# Altium PCB SiLPA.PcbDoc (part 1 of 10)
Units mm, origin at the board's own origin, x right, y up, seen from the top; angles counter-clockwise.
Board outline 222.36 x 100 mm, 4 copper layers (L1, P2, L3, L4), stack 1.598 mm thick; 583 components, 330 nets, 1692 pads, 1781 vias.
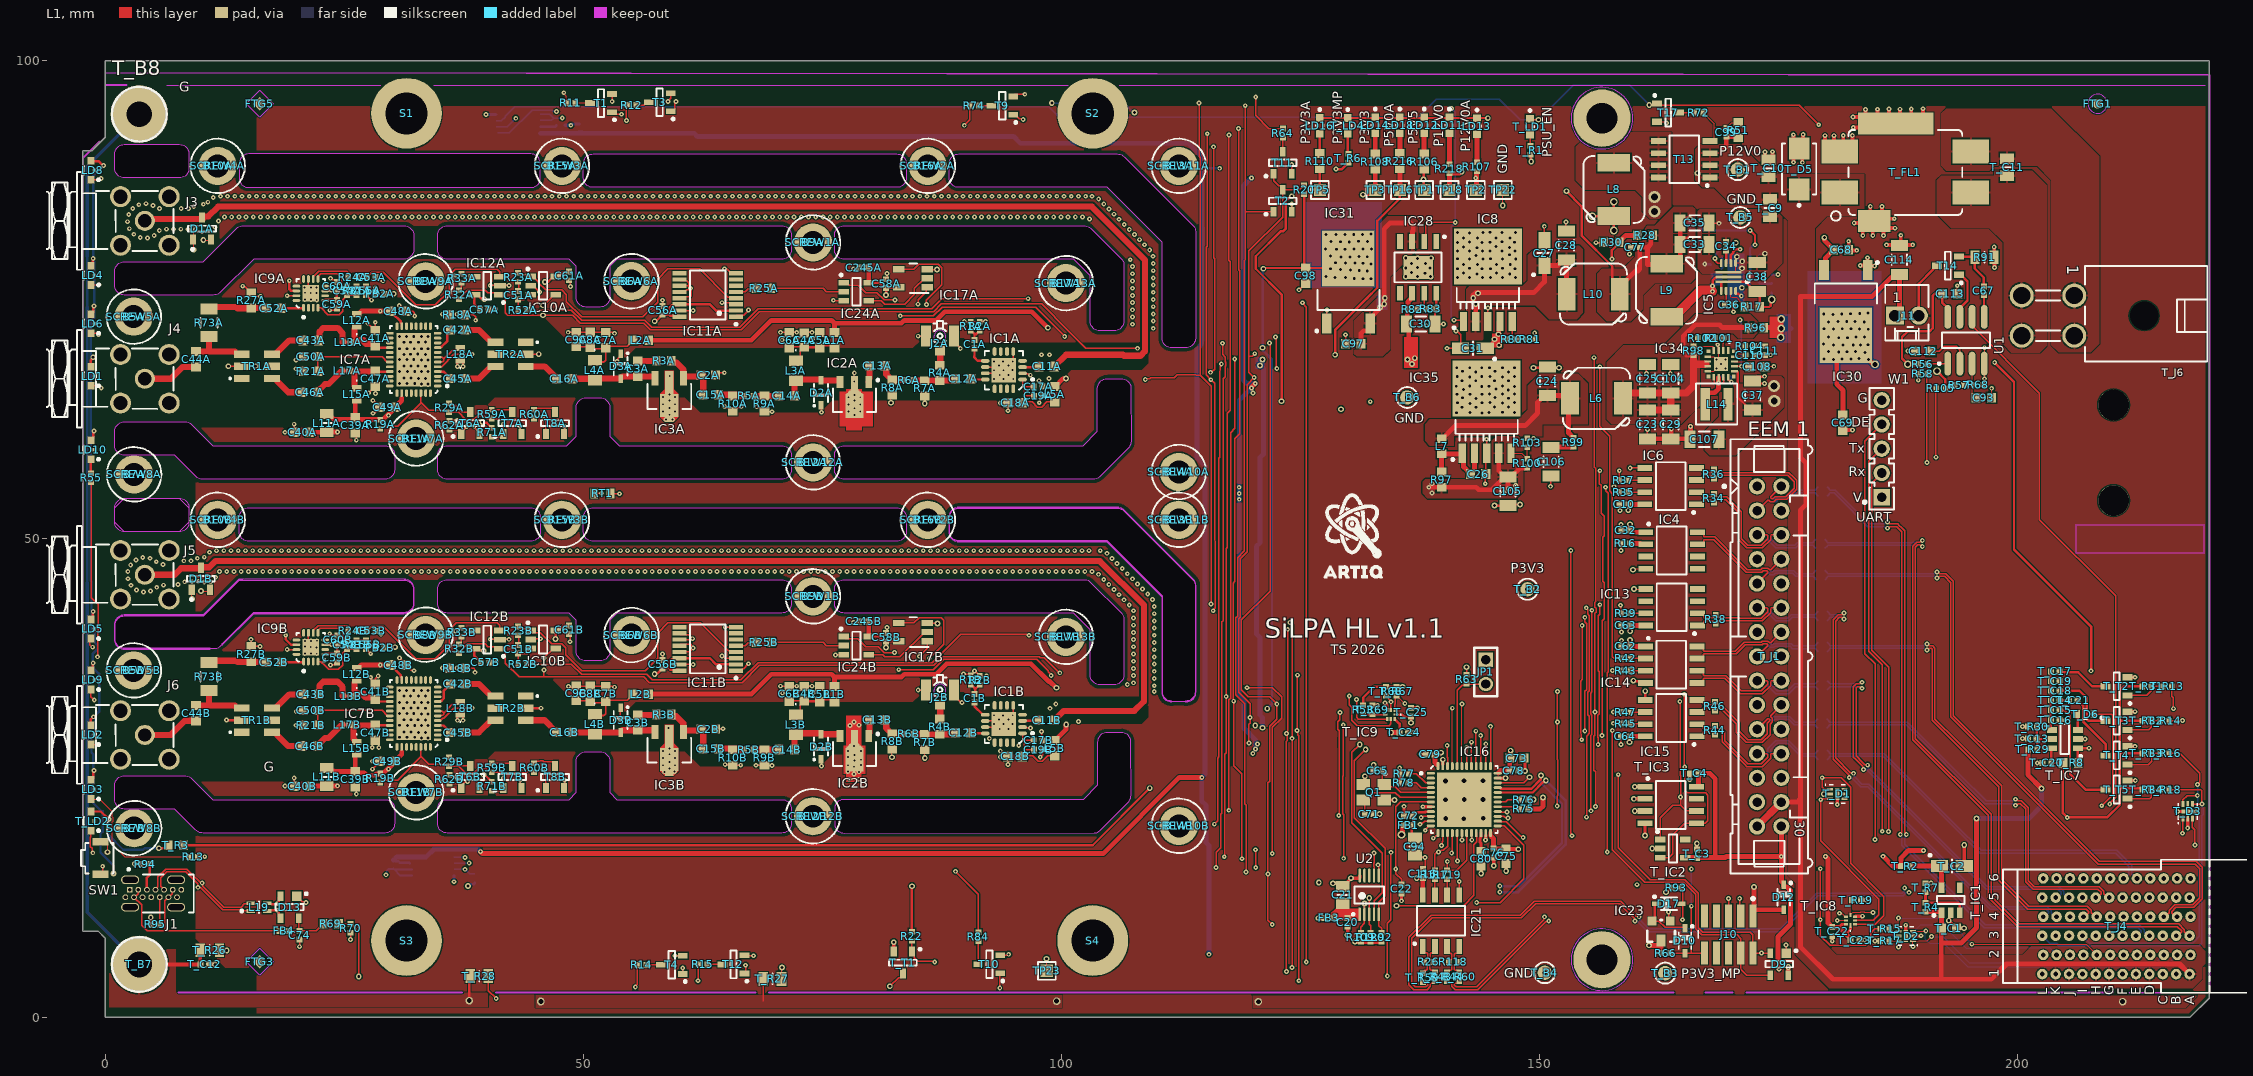
[diagram p0: L1 view]
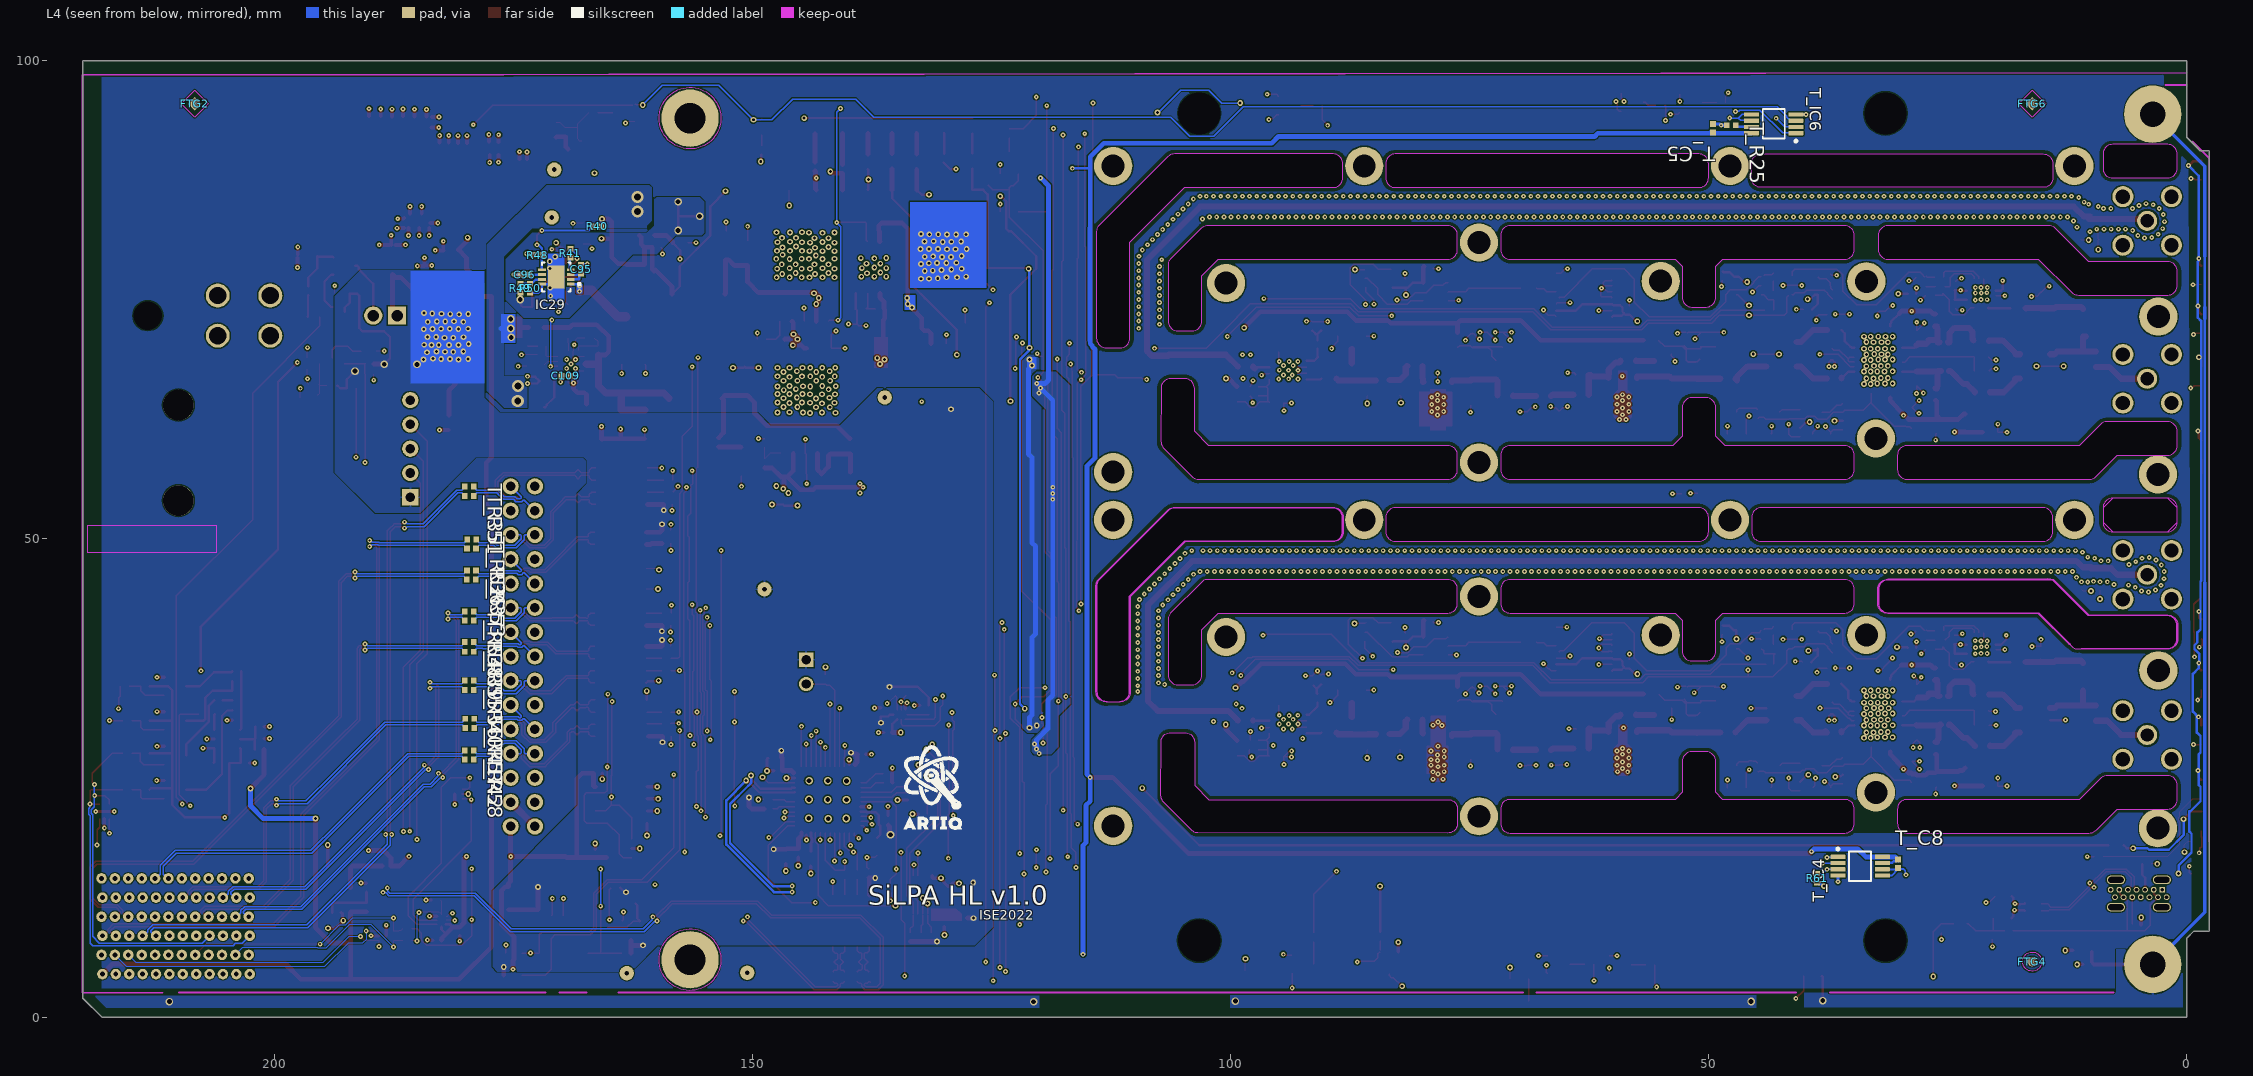
[diagram p1: L4 view, seen from below]
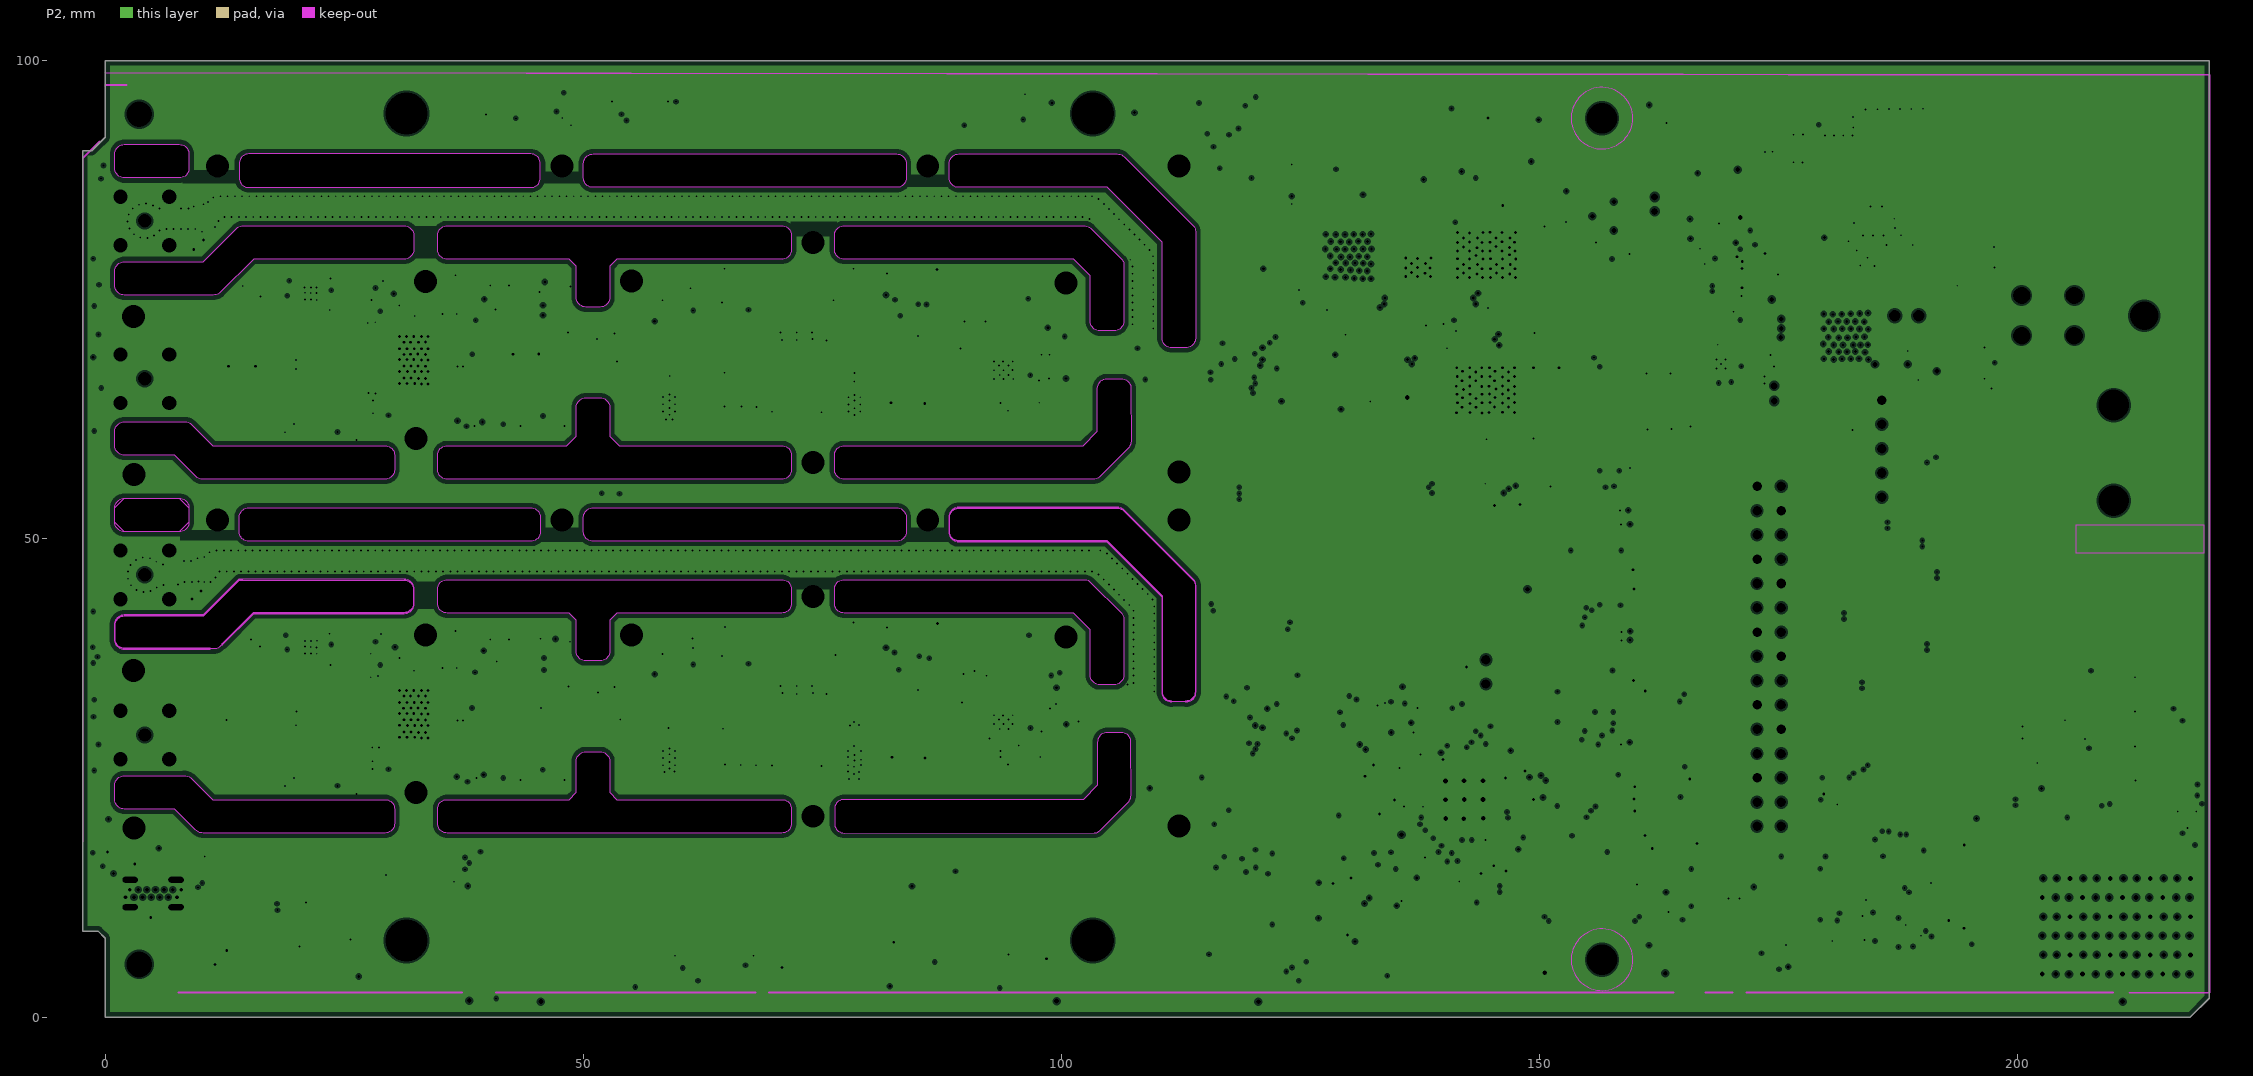
[diagram p2: P2, clearances drawn from the general rule]
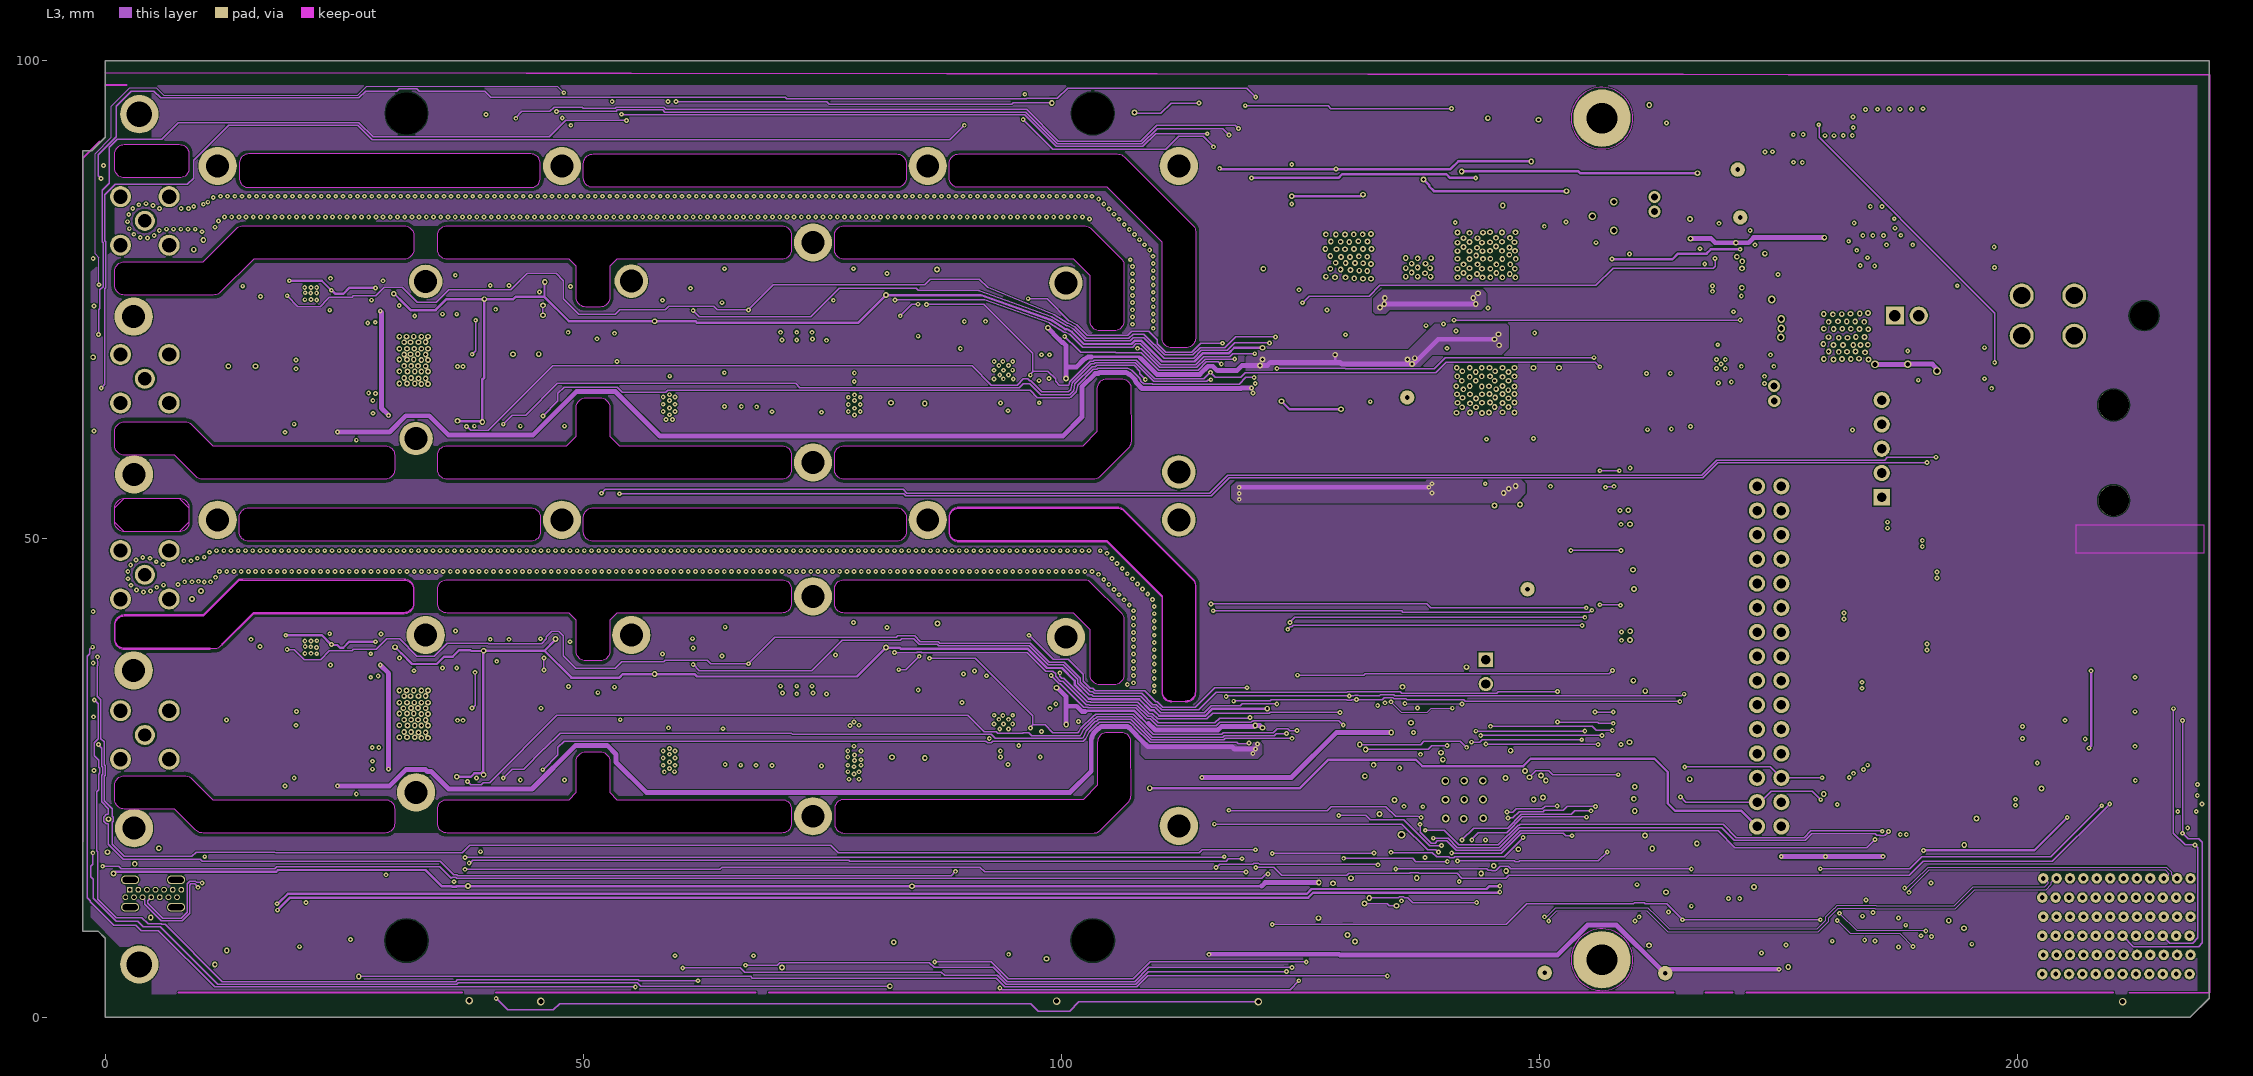
[diagram p3: L3]

## Layer stack, top to bottom
TopSolder: solder mask 0.0225, Solder Resist, Dk 3.5
L1: signal copper 0.053
Dielectric1: core 0.36, FR-4, Dk 4.2
P2: plane copper 0.036, net GND
Dielectric3: core 0.7, FR-4, Dk 4.2
L3: signal copper 0.036
Dielectric5: core 0.36, FR-4, Dk 4.2
L4: signal copper 0.053
BottomSolder: solder mask 0.0225, Solder Resist, Dk 3.5

## Board outline
0,0 0,8.25 -0.75,9 -2.356,9 -2.356,89.938 -2.356,90.575 -1.425,90.575 -1,91 0,92 0,100 220,100 220,1.98 218.02,0
cut-out: 15,49.75 cw(c15,50.75) 14,50.75 14,52.25 cw(c15,52.25) 15,53.25 44.5,53.25 cw(c44.5,52.25) 45.5,52.25 45.5,50.75 cw(c44.5,50.75) 44.5,49.75
cut-out: 89.25,86.75 cw(c89.25,87.75) 88.25,87.75 88.25,89.25 cw(c89.25,89.25) 89.25,90.25 105.842,90.257 cw(c105.842,89.289) 106.526,89.974 113.774,82.726 cw(c113.213,82.166) 114.006,82.166 114,71 cw(c113,71) 113,70 111.5,70 cw(c111.5,71) 110.5,71 110.5,81 104.75,86.75
cut-out: 89.25,49.75 cw(c89.25,50.75) 88.25,50.75 88.25,52.25 cw(c89.25,52.25) 89.25,53.25 105.807,53.258 cw(c105.807,52.206) 106.536,52.963 113.737,45.762 cw(c113.043,45.093) 114.007,45.093 114,34 cw(c113,34) 113,33 111.5,33 cw(c111.5,34) 110.5,34 110.5,44 104.75,49.75
cut-out: 89.25,49.7 104.729,49.7 110.45,43.979 110.45,34 ccw(c111.5,34) 111.5,32.95 111.5,33.05 cw(c111.5,34) 110.55,34 110.55,44 110.536,44.036 104.786,49.786 104.75,49.8 89.25,49.8 cw(c89.25,50.75) 88.3,50.75 88.3,52.25 cw(c89.25,52.25) 89.25,53.2 105.807,53.207 cw(c105.807,52.206) 106.501,52.927 113.701,45.727 cw(c113.043,45.093) 113.956,45.093 113.95,34 cw(c113,34) 113,33.05 ccw(c113,33) 113,32.95 ccw(c113,34) 114.05,34 114.057,45.093 ccw(c113.043,45.093) 113.773,45.797 113.772,45.798 106.572,52.999 106.571,53 ccw(c105.807,52.206) 105.807,53.308 89.25,53.3 ccw(c89.25,52.25) 88.2,52.25 88.2,50.75 ccw(c89.25,50.75)
cut-out: 76.25,20.25 ccw(c77.25,20.25) 77.25,19.25 103.417,19.26 ccw(c103.417,20.083) 103.989,19.49 106.963,22.464 ccw(c106.206,23.194) 107.258,23.194 107.25,28.75 ccw(c106.25,28.75) 106.25,29.75 104.75,29.75 ccw(c104.75,28.75) 103.75,28.75 103.75,24.25 102.25,22.75 77.25,22.75 ccw(c77.25,21.75) 76.25,21.75
cut-out: 2,21.75 cw(c2,22.75) 1,22.75 1,24.25 cw(c2,24.25) 2,25.25 8.21,25.254 cw(c8.21,23.959) 9.108,24.891 11.25,22.75 29.25,22.75 cw(c29.25,21.75) 30.25,21.75 30.25,20.25 cw(c29.25,20.25) 29.25,19.25 10.258,19.245 cw(c10.258,20.459) 9.416,19.585 7.25,21.75
cut-out: 35.75,19.25 cw(c35.75,20.25) 34.75,20.25 34.75,21.75 cw(c35.75,21.75) 35.75,22.75 48.5,22.75 49.25,23.5 49.25,26.75 cw(c50.25,26.75) 50.25,27.75 51.75,27.75 cw(c51.75,26.75) 52.75,26.75 52.75,23.5 53.5,22.75 70.75,22.75 cw(c70.75,21.75) 71.75,21.75 71.75,20.25 cw(c70.75,20.25) 70.75,19.25
cut-out: 77.25,42.25 cw(c77.25,43.25) 76.25,43.25 76.25,44.75 cw(c77.25,44.75) 77.25,45.75 102.343,45.757 cw(c102.343,44.793) 103.012,45.487 106.292,42.205 cw(c105.798,41.729) 106.484,41.729 106.5,35.75 cw(c105.5,35.75) 105.5,34.75 104,34.75 cw(c104,35.75) 103,35.75 103,40.5 101.25,42.25
cut-out: 49.25,41.5 48.5,42.25 35.75,42.25 cw(c35.75,43.25) 34.75,43.25 34.75,44.75 cw(c35.75,44.75) 35.75,45.75 70.75,45.75 cw(c70.75,44.75) 71.75,44.75 71.75,43.25 cw(c70.75,43.25) 70.75,42.25 53.5,42.25 52.75,41.5 52.75,38.25 cw(c51.75,38.25) 51.75,37.25 50.25,37.25 cw(c50.25,38.25) 49.25,38.25
cut-out: 2,38.5 cw(c2,39.5) 1,39.5 1,41 cw(c2,41) 2,42 10.175,42 13.601,45.426 cw(c14.554,44.437) 14.554,45.81 31.25,45.8 31.25,45.75 cw(c31.25,44.75) 32.25,44.75 32.25,43.25 cw(c31.25,43.25) 31.25,42.25 15.5,42.25 12.012,38.763 cw(c11.343,39.457) 11.343,38.493
cut-out: 35.75,56.25 cw(c35.75,57.25) 34.75,57.25 34.75,58.75 cw(c35.75,58.75) 35.75,59.75 48.25,59.75 49.25,60.75 49.25,63.75 cw(c50.25,63.75) 50.25,64.75 51.75,64.75 cw(c51.75,63.75) 52.75,63.75 52.75,60.75 53.75,59.75 70.75,59.75 cw(c70.75,58.75) 71.75,58.75 71.75,57.25 cw(c70.75,57.25) 70.75,56.25
cut-out: 77.25,56.25 cw(c77.25,57.25) 76.25,57.25 76.25,58.75 cw(c77.25,58.75) 77.25,59.75 102.25,59.75 103.75,61.25 103.75,65.75 cw(c104.75,65.75) 104.75,66.75 106.25,66.75 cw(c106.25,65.75) 107.25,65.75 107.258,60.194 cw(c106.206,60.194) 106.963,59.464 104.048,56.549 cw(c103.288,57.337) 103.288,56.242
cut-out: 51,49.75 cw(c51,50.75) 50,50.75 50,52.25 cw(c51,52.25) 51,53.25 82.75,53.25 cw(c82.75,52.25) 83.75,52.25 83.75,50.75 cw(c82.75,50.75) 82.75,49.75
cut-out: 2,50.75 cw(c2,51.75) 1,51.75 1,53.25 cw(c2,53.25) 2,54.25 7.75,54.25 cw(c7.75,53.25) 8.75,53.25 8.75,51.75 cw(c7.75,51.75) 7.75,50.75
cut-out: 2,58.75 cw(c2,59.75) 1,59.75 1,61.25 cw(c2,61.25) 2,62.25 8.399,62.241 cw(c8.399,61.374) 9.001,61.998 11.25,59.75 29.25,59.75 cw(c29.25,58.75) 30.25,58.75 30.25,57.25 cw(c29.25,57.25) 29.25,56.25 10.129,56.24 cw(c10.129,57.129) 9.512,56.489 7.25,58.75
cut-out: 2,75.5 cw(c2,76.5) 1,76.5 1,78 cw(c2,78) 2,79 10.25,79 13.725,82.476 cw(c14.427,81.748) 14.427,82.759 31.25,82.75 cw(c31.25,81.75) 32.25,81.75 32.25,80.25 cw(c31.25,80.25) 31.25,79.25 15.5,79.25 12.035,75.797 cw(c11.3,76.559) 11.3,75.5
cut-out: 49.25,78.5 48.5,79.25 35.75,79.25 cw(c35.75,80.25) 34.75,80.25 34.75,81.75 cw(c35.75,81.75) 35.75,82.75 70.75,82.75 cw(c70.75,81.75) 71.75,81.75 71.75,80.25 cw(c70.75,80.25) 70.75,79.25 53.5,79.25 52.75,78.5 52.75,75.25 cw(c51.75,75.25) 51.75,74.25 50.25,74.25 cw(c50.25,75.25) 49.25,75.25
cut-out: 77.25,79.25 cw(c77.25,80.25) 76.25,80.25 76.25,81.75 cw(c77.25,81.75) 77.25,82.75 102.34,82.758 cw(c102.34,81.786) 103.027,82.474 106.328,79.166 cw(c105.912,78.75) 106.5,78.75 106.5,72.75 cw(c105.5,72.75) 105.5,71.75 104,71.75 cw(c104,72.75) 103,72.75 103,77.5 101.25,79.25
cut-out: 50,87.75 50,89.25 cw(c51,89.25) 51,90.25 82.75,90.25 cw(c82.75,89.25) 83.75,89.25 83.75,87.75 cw(c82.75,87.75) 82.75,86.75 51,86.75 cw(c51,87.75)
cut-out: 15,86.75 44.5,86.75 ccw(c44.5,87.75) 45.5,87.75 45.5,89.25 ccw(c44.5,89.25) 44.5,90.25 15,90.25 ccw(c15,89.25) 14,89.25 14,87.75 ccw(c15,87.75)
cut-out: 2,87.75 cw(c2,88.75) 1,88.75 1,90.25 cw(c2,90.25) 2,91.25 7.75,91.25 cw(c7.75,90.25) 8.75,90.25 8.75,88.75 cw(c7.75,88.75) 7.75,87.75
cut-out: 2,38.55 cw(c2,39.5) 1.05,39.5 1.05,41 cw(c2,41) 2,41.95 10.25,41.95 10.286,41.964 14.021,45.7 31.25,45.7 cw(c31.25,44.75) 32.2,44.75 32.2,43.25 cw(c31.25,43.25) 31.25,42.3 15.5,42.3 15.464,42.286 12.214,39.036 ccw(c12.25,39) 12.286,38.964 15.521,42.2 31.25,42.2 ccw(c31.25,43.25) 32.3,43.25 32.3,44.75 ccw(c31.25,44.75) 31.25,45.8 14,45.8 13.964,45.786 10.229,42.05 2,42.05 ccw(c2,41) 0.95,41 0.95,39.5 ccw(c2,39.5) 2,38.45 11,38.45 11,38.55
cut-out: 2,54.25 7.75,54.25 8.75,53.25 8.75,51.75 7.75,50.75 2,50.75 1,51.75 1,53.25

## Design rules (kind name [scope] priority, off if disabled: settings)
AcuteAngle [All] p1: minimum=6.00000000000000E+0001 checktracksonly=FALSE
AssemblyTestPointUsage [All] p1 off:
AssemblyTestpoint [All] p1 off: testpointundercomponent=TRUE minsize=1.016 maxsize=2.54 preferedsize=1.524 minholesize=0 maxholesize=1.016 preferedholesize=0.813 testpointgrid=0.025 usegrid=TRUE gridtolerance=0 allowsidetop=TRUE allowsidebottom=TRUE
BoardOutlineClearance [OnLayer('L1')      or OnLayer('L4')    or OnLayer('L3')] p1: gap=0.4 ignorepadtopadclearanceinfootprint=FALSE
Clearance Clearance_Heatsink [(OnLayer('Mechanical 13'))] p1: gap=0 ignorepadtopadclearanceinfootprint=FALSE
Clearance Clearance_50Ohm [InNetClass('50Ohm') or InNetClass('50_Ohms')] p2: gap=0.203 ignorepadtopadclearanceinfootprint=TRUE
Clearance [All] p3: gap=0.125 ignorepadtopadclearanceinfootprint=FALSE except(0.12: SMDPad-SMDPad)
Clearance Clearance_50Ohm_Poly [InNetClass('50_Ohms') vs InPolygon] p4: gap=0.5 ignorepadtopadclearanceinfootprint=FALSE except(0: Arc-Hole Track-Hole SMDPad-Hole THPad-Hole Via-Hole Fill-Hole Poly-Hole Region-Hole Text-Hole)
Clearance Clearance_outer [OnLayer('TopLayer') or OnLayer('BottomLayer')] p5: gap=0.089 ignorepadtopadclearanceinfootprint=FALSE except(0: Arc-Hole Track-Hole SMDPad-Hole THPad-Hole Via-Hole Fill-Hole Poly-Hole Region-Hole Text-Hole; 0.1: Arc-Fill Arc-Region Track-Fill Track-Region Fill-Fill Fill-Region Poly-Region Region-Region; 0.127: Arc-Poly Track-Poly SMDPad-Poly THPad-Poly Fill-Poly Poly-Poly; 0.15: Via-Fill Via-Region; 0.152: Via-Poly; 0.2: Arc-THPad Track-THPad SMDPad-THPad THPad-THPad THPad-Via; 0.254: Arc-Text Track-Text SMDPad-Text THPad-Text Via-Text Fill-Text Poly-Text Region-Text Text-Text; 0.275: Via-Via)
Clearance Clearance_inner [(OnLayer('MidLayer1') OR OnLayer('MidLayer2') OR OnLayer('SignalLayer1'))] p6: gap=0.254 ignorepadtopadclearanceinfootprint=FALSE except(0: Arc-Hole Track-Hole SMDPad-Hole THPad-Hole Via-Hole Fill-Hole Poly-Hole Region-Hole Text-Hole; 0.076: Arc-Arc Arc-Track Arc-SMDPad Arc-Via Track-Track Track-SMDPad Track-Via SMDPad-SMDPad SMDPad-Via SMDPad-Fill SMDPad-Region THPad-Fill THPad-Region; 0.1: Track-Region; 0.127: Arc-Poly Track-Poly SMDPad-Poly THPad-Poly Via-Poly Fill-Poly; 0.15: Via-Fill Via-Region Region-Region; 0.152: Poly-Poly Poly-Region; 0.2: THPad-Via; 0.25: Arc-THPad Arc-Fill Arc-Region Track-THPad Track-Fill SMDPad-THPad THPad-THPad Via-Via Fill-Fill Fill-Region)
Clearance Clearance_poly_balancing [InNamedPolygon('BAL_TOP') or InNamedPolygon('BAL_BOT') or InNamedPolygon('ML1_BAL') or  InNamedPolygon('ML2_BAL')] p7: gap=0.152 ignorepadtopadclearanceinfootprint=FALSE
ComponentClearance [All] p1: gap=0 collisioncheckmode=3 verticalgap=0 showdistances=FALSE
DiffPairsRouting DiffPairsRouting_100_Ohm [InDifferentialPairClass('Diff_100Ohm')] p1: maxlimit=0.178 minlimit=0.127 mostfreqgap=0.178 toplayer_maxgap=0.127 toplayer_prefgap=0.127 toplayer_minwidth=0.152 toplayer_maxwidth=0.152 toplayer_prefwidth=0.152 midlayer1_mingap=0.178 midlayer1_minwidth=0.127 midlayer1_maxwidth=0.127 midlayer1_prefwidth=0.127 bottomlayer_maxgap=0.127 bottomlayer_prefgap=0.127 bottomlayer_minwidth=0.152 bottomlayer_maxwidth=0.152 bottomlayer_prefwidth=0.152 impedanceprofiledriven=TRUE impedanceprofileid={F0C0005D-09B6-4C96-BFDB-F5CF1CA237D7} impedanceprofilevalue=100.000000 maxuncoupledlength=11.1
DiffPairsRouting DiffPairsRouting_90_Ohm [InDifferentialPairClass('Diff_90Ohm')] p2: maxlimit=0.178 minlimit=0.127 mostfreqgap=0.178 toplayer_maxgap=0.127 toplayer_prefgap=0.127 toplayer_minwidth=0.152 toplayer_maxwidth=0.152 toplayer_prefwidth=0.152 midlayer1_mingap=0.178 midlayer1_minwidth=0.127 midlayer1_maxwidth=0.127 midlayer1_prefwidth=0.127 bottomlayer_maxgap=0.127 bottomlayer_prefgap=0.127 bottomlayer_minwidth=0.152 bottomlayer_maxwidth=0.152 bottomlayer_prefwidth=0.152 impedanceprofiledriven=TRUE impedanceprofileid={F0C0005D-09B6-4C96-BFDB-F5CF1CA237D7} impedanceprofilevalue=100.000000 maxuncoupledlength=12.7
DiffPairsRouting DiffPairsRouting_lvpecl [InDifferentialPairClass('LVPECL')] p3: maxlimit=0.25 minlimit=0.125 mostfreqgap=0.25 toplayer_maxgap=0.125 toplayer_prefgap=0.125 toplayer_minwidth=0.095 toplayer_maxwidth=0.095 toplayer_prefwidth=0.095 midlayer1_mingap=0.25 midlayer1_minwidth=0.15 midlayer1_maxwidth=0.15 midlayer1_prefwidth=0.15 bottomlayer_maxgap=0.125 bottomlayer_prefgap=0.125 bottomlayer_minwidth=0.095 bottomlayer_maxwidth=0.095 bottomlayer_prefwidth=0.095 maxuncoupledlength=3
FabricationTestPointUsage TestPointUsage [All] p1: valid=0 allowmultiple=FALSE
FabricationTestpoint Testpoint [All] p1: side=3 testpointundercomponent=TRUE minsize=1.016 maxsize=2.54 preferedsize=1.524 minholesize=0.508 maxholesize=1.016 preferedholesize=0.813 testpointgrid=0.025 allowsidetop=TRUE allowsidebottom=TRUE usegrid=TRUE gridtolerance=0
Height Height_1 [OnLayer('BottomLayer')] p2: minheight=0 maxheight=2 prefheight=1
HoleSize [All] p1: absolutevalues=TRUE maxlimit=5 minlimit=0.15 maxpercent=80.000 minpercent=20.000
HoleToHoleClearance [All] p1: gap=0.15 allowstackedmicrovias=TRUE
MatchedLengths MatchedLengths_GTP_J9 [InxSignalClass('GTP_J9')] p1: tolerance=1 checknetsindiffpair=TRUE checkdiffpairvsdiffpair=FALSE checkxsignals=FALSE checkothers=FALSE
MatchedLengths MatchedLengths_GTP_J10 [InxSignalClass('GTP_J10')] p2: tolerance=1 checknetsindiffpair=TRUE checkdiffpairvsdiffpair=FALSE checkxsignals=FALSE checkothers=FALSE
MatchedLengths MatchedLengths_GTP_J11 [InxSignalClass('GTP_J11')] p3: tolerance=1 checknetsindiffpair=TRUE checkdiffpairvsdiffpair=FALSE checkxsignals=FALSE checkothers=FALSE
MatchedLengths MatchedLengths_EEM0 [InNetClass('EEM0')] p4: tolerance=10 checknetsindiffpair=FALSE checkdiffpairvsdiffpair=TRUE checkxsignals=TRUE checkothers=TRUE
MatchedLengths MatchedLengths_EEM1 [InNetClass('EEM1')] p5: tolerance=10 checknetsindiffpair=FALSE checkdiffpairvsdiffpair=TRUE checkxsignals=TRUE checkothers=TRUE
MatchedLengths MatchedLengths_DDR_CLOCKS_STROBES [InxSignalClass('ADDR_PP1') OR InxSignalClass('DATA_BL0')] p6: tolerance=0.508 checknetsindiffpair=TRUE checkdiffpairvsdiffpair=FALSE checkxsignals=FALSE checkothers=FALSE
MatchedLengths MatchedLengths_DATA_BL0 [InxSignalClass('DATA_BL0')] p7: tolerance=1.3 checknetsindiffpair=FALSE checkdiffpairvsdiffpair=TRUE checkxsignals=TRUE checkothers=TRUE
MatchedLengths MatchedLengths_ADDR_PP1 [InxSignalClass('ADDR_PP1')] p8: tolerance=2 checknetsindiffpair=FALSE checkdiffpairvsdiffpair=TRUE checkxsignals=TRUE checkothers=TRUE
MatchedLengths MatchedLengths_Clock_Fanout [InxSignalClass('Clock fanout')] p9: tolerance=1 checknetsindiffpair=FALSE checkdiffpairvsdiffpair=TRUE checkxsignals=TRUE checkothers=TRUE
MatchedLengths MatchedLengths_Clock_Fanout_DAC [InxSignalClass('Clock Fanout-DAC')] p10: tolerance=1 checknetsindiffpair=FALSE checkdiffpairvsdiffpair=TRUE checkxsignals=TRUE checkothers=TRUE
MatchedLengths MatchedLengths_diff_clocks [InxSignalClass('Differential clocks-IC5') and InxSignalClass('Differential clocks-OSC2')] p11: tolerance=1 checknetsindiffpair=TRUE checkdiffpairvsdiffpair=FALSE checkxsignals=FALSE checkothers=FALSE
MatchedLengths MatchedLengths_DAC_Pair [InNetClass('DAC')] p12: tolerance=0.127 checknetsindiffpair=TRUE checkdiffpairvsdiffpair=FALSE checkxsignals=FALSE checkothers=FALSE
MatchedLengths MatchedLengths_DAC_Group [InNetClass('DAC')] p13: tolerance=10 checknetsindiffpair=FALSE checkdiffpairvsdiffpair=TRUE checkxsignals=TRUE checkothers=TRUE
MatchedLengths MatchedLengths_ADC [InxSignalClass('ADC')] p14: tolerance=0.127 checknetsindiffpair=FALSE checkdiffpairvsdiffpair=TRUE checkxsignals=TRUE checkothers=TRUE
MatchedLengths MatchedLengths_DAC_OUT_AB_Group [InxSignalClass('DAC-OUT_AB')] p15: tolerance=1 checknetsindiffpair=FALSE checkdiffpairvsdiffpair=TRUE checkxsignals=TRUE checkothers=TRUE
MatchedLengths MatchedLengths_DAC_OUT_CD_Group [InxSignalClass('DAC-OUT_CD')] p16: tolerance=1 checknetsindiffpair=FALSE checkdiffpairvsdiffpair=TRUE checkxsignals=TRUE checkothers=TRUE
MatchedLengths MatchedLengths_DAC_OUT_AB_Pair [InxSignalClass('DAC-OUT_AB')] p17: tolerance=0.2 checknetsindiffpair=TRUE checkdiffpairvsdiffpair=FALSE checkxsignals=FALSE checkothers=FALSE
MatchedLengths MatchedLengths_DAC_OUT_CD_Pair [InxSignalClass('DAC-OUT_CD')] p18: tolerance=0.2 checknetsindiffpair=TRUE checkdiffpairvsdiffpair=FALSE checkxsignals=FALSE checkothers=FALSE
MatchedLengths MatchedLengths_DAC_UPCONV_A_Group [InxSignalClass('DAC-UPCONVERTER_A')] p19: tolerance=1 checknetsindiffpair=FALSE checkdiffpairvsdiffpair=TRUE checkxsignals=TRUE checkothers=TRUE
MatchedLengths MatchedLengths_DAC_UPCONV_B_Group [InxSignalClass('DAC-UPCONVERTER_B')] p20: tolerance=1 checknetsindiffpair=FALSE checkdiffpairvsdiffpair=TRUE checkxsignals=TRUE checkothers=TRUE
MatchedLengths MatchedLengths_DAC_UPCONV_A_Pair [InxSignalClass('DAC-UPCONVERTER_A')] p21: tolerance=0.5 checknetsindiffpair=TRUE checkdiffpairvsdiffpair=FALSE checkxsignals=FALSE checkothers=FALSE
MatchedLengths MatchedLengths_DAC_UPCONV_B_Pair [InxSignalClass('DAC-UPCONVERTER_B')] p22: tolerance=0.2 checknetsindiffpair=TRUE checkdiffpairvsdiffpair=FALSE checkxsignals=FALSE checkothers=FALSE
MatchedLengths MatchedLengths_DAC_UPCONV_A&B_Group [InxSignalClass('DAC-UPCONVERTER_A&B')] p23: tolerance=1 checknetsindiffpair=FALSE checkdiffpairvsdiffpair=TRUE checkxsignals=TRUE checkothers=TRUE
MatchedLengths MatchedLengths_DAC_UPCONV_A&B_Pair [InxSignalClass('DAC-UPCONVERTER_A&B')] p24: tolerance=0.3 checknetsindiffpair=TRUE checkdiffpairvsdiffpair=FALSE checkxsignals=FALSE checkothers=FALSE
MatchedLengths MatchedLengths_sfp [InDifferentialPairClass('SFP_RX_TX')] p25: tolerance=1 checknetsindiffpair=TRUE checkdiffpairvsdiffpair=FALSE checkxsignals=FALSE checkothers=FALSE
MatchedLengths [InDifferentialPairClass('All Differential Pairs')] p26: tolerance=5 checknetsindiffpair=TRUE checkdiffpairvsdiffpair=FALSE checkxsignals=FALSE checkothers=FALSE
MinimumAnnularRing MinimumAnnularRing_outer [OnLayer('TopLayer') or OnLayer('BottomLayer')] p1: minimumring=0.05
MinimumAnnularRing MinimumAnnularRing_mid [OnLayer('MidLayer1') or OnLayer('MidLayer2') or OnLayer('MidLayer3') or OnLayer('MidLayer4')] p2: minimumring=0.15
MinimumSolderMaskSliver [All] p1: minsoldermaskwidth=0.15
ParallelSegment [All] p1 off: limit=5 gap=0.254
PlaneClearance [All] p1: clearance=0.2
PlaneConnect [All] p1: pad.planeconnectstyle=Relief pad.reliefexpansion=0.2 pad.reliefentries=4 pad.reliefconductorwidth=0.254 pad.reliefairgap=0.15 via.planeconnectstyle=Direct via.reliefexpansion=0.2 via.reliefentries=4 via.reliefconductorwidth=0.254 via.reliefairgap=0.15
PolygonConnect [All] p1: thpad.connectstyle=Relief thpad.reliefconductorwidth=0.254 thpad.reliefentries=4 thpad.polygonreliefangle="90 Angle" thpad.airgapwidth=0.15 smdpad.connectstyle=Relief smdpad.reliefconductorwidth=0.254 smdpad.reliefentries=4 smdpad.polygonreliefangle="90 Angle" smdpad.airgapwidth=0.15 via.connectstyle=Direct via.reliefconductorwidth=0.254 via.reliefentries=4 via.polygonreliefangle="45 Angle" via.airgapwidth=0.254
RoomDefinition U_SiLPA_RF_detector1 [InComponentClass('U_SiLPA_RF_detector1')] p1 off: confinementstyle=ConfineIn formatcopy=TRUE lockcomponents=FALSE outline 7.75,34.5 104.553,34.5 104.553,42.25 7.75,42.25
RoomDefinition U_SiLPA_RF_detector0 [InComponentClass('U_SiLPA_RF_detector0')] p2 off: confinementstyle=ConfineIn formatcopy=TRUE lockcomponents=FALSE outline 7.75,71.5 104.553,71.5 104.553,79.25 7.75,79.25
RoomDefinition U_SiLPA_RF_channel_preamp1 [InComponentClass('U_SiLPA_RF_channel_preamp1')] p3 off: confinementstyle=ConfineIn formatcopy=TRUE lockcomponents=FALSE outline 49,38.43 105,38.43 105,22.75 49,22.75
RoomDefinition U_SiLPA_RF_channel0 [InComponentClass('U_SiLPA_RF_channel0')] p4 off: selectionmemoryflags=1 confinementstyle=ConfineIn formatcopy=TRUE lockcomponents=FALSE outline 49,75.495 7.75,75.495 7.75,59.75 49,59.75
RoomDefinition U_SiLPA_PWR_Supply [InComponentClass('U_SiLPA_PWR_Supply')] p5 off: confinementstyle=ConfineIn formatcopy=TRUE lockcomponents=FALSE outline 113.284,0.508 136.988,0.508 136.988,48.343 113.284,48.343
RoomDefinition U_SiLPA_MCU [InComponentClass('U_SiLPA_MCU')] p6 off: confinementstyle=ConfineIn formatcopy=TRUE lockcomponents=FALSE outline 116.772,96.012 168.656,96.012 168.656,50.431 116.772,50.431
RoomDefinition U_SiLPA_LVDS_IFC [InComponentClass('U_SiLPA_LVDS_IFC')] p7 off: confinementstyle=ConfineIn formatcopy=TRUE lockcomponents=FALSE outline 134.781,2.032 159.512,2.032 159.512,64.467 134.781,64.467
RoomDefinition SiLPA [InComponentClass('SiLPA')] p8 off: confinementstyle=ConfineIn formatcopy=TRUE lockcomponents=FALSE outline -2.231,4.255 25.908,4.255 25.908,15.35 -2.231,15.35
RoomDefinition U_SiLPA_RF_channel1 [InComponentClass('U_SiLPA_RF_channel1')] p9 off: confinementstyle=ConfineIn formatcopy=TRUE lockcomponents=FALSE outline 49,38.495 7.75,38.495 7.75,22.75 49,22.75
RoomDefinition U_SiLPA_RF_channel_preamp0 [InComponentClass('U_SiLPA_RF_channel_preamp0')] p10 off: confinementstyle=ConfineIn formatcopy=TRUE lockcomponents=FALSE outline 49,75.43 105,75.43 105,59.75 49,59.75
RoutingLayers RoutingLayers_1 [InNetClass('Diff_100Ohm')] p1 off: top layer_v5=TRUE mid layer 1_v5=FALSE bottom layer_v5=TRUE
RoutingLayers [All] p2: top layer_v5=TRUE mid layer 1_v5=TRUE bottom layer_v5=TRUE
RoutingTopology RoutingTopology_DDRAddressAndControls [InNetClass('DDR_AddressAndControls')] p1: topology=Daisy_Simple
RoutingTopology [All] p2: topology=Shortest
RoutingVias [InNetClass('PWR')] p1: holewidth=0.15 width=0.35 viastyle="Through Hole" minholewidth=0.15 minwidth=0.35 maxholewidth=0.6 maxwidth=0.8 useviatemplates=TRUE viatemplateguid#1={62D689FC-173C-4A91-B012-C53CC36F8216} viatemplateguid#2={8EF08869-C50F-4D4D-A944-4F9304652C77} viatemplateguid#3={6457642F-5713-4B16-A7F6-BD4CBD7F6887} viatemplatename#1=v60h30m0mx0 viatemplatename#2=v80h50m0mx0 viatemplatename#3=v127h71m0mx0
RoutingVias RoutingVias_1 [All] p2: holewidth=0.711 width=1.27 viastyle="Through Hole" minholewidth=0.711 minwidth=1.27 maxholewidth=0.711 maxwidth=1.27 useviatemplates=TRUE viatemplateguid#1={97258106-5773-4E56-A26A-6036B3AE1039} viatemplateguid#2={62D689FC-173C-4A91-B012-C53CC36F8216} viatemplateguid#3={8EF08869-C50F-4D4D-A944-4F9304652C77} viatemplateguid#4={6457642F-5713-4B16-A7F6-BD4CBD7F6887} viatemplatename#1=v50h20m0mx0 viatemplatename#2=v60h30m0mx0 viatemplatename#3=v80h50m0mx0 viatemplatename#4=v127h71m0mx0
SMDEntry [All] p1 off: side=TRUE corner=TRUE anyangle=FALSE
SilkToSilkClearance [All] p1: silktosilkclearance=0.15
SilkToSolderMaskClearance SilkscreenOverComponentPads [IsPad] p1: minsilkscreentomaskgap=0.15 clearancetoexposedcopper=FALSE
SolderMaskExpansion [All] p1: expansion=0.05 istentingtop=FALSE
StubLength [All] p1: limit=3
SupplyNets "Schematic Supply Nets_15" [InNet('P3V3')] p1: voltage=0.000
SupplyNets "Schematic Supply Nets_14" [InNet('P12V0_SW')] p2: voltage=0.000
SupplyNets "Schematic Supply Nets_13" [InNet('P3V3_MP')] p3: voltage=0.000
SupplyNets "Schematic Supply Nets_12" [InNet('P3V3A')] p4: voltage=0.000
SupplyNets "Schematic Supply Nets_11" [InNet('P5V5A')] p5: voltage=0.000
SupplyNets "Schematic Supply Nets_10" [InNet('P5V5')] p6: voltage=0.000
SupplyNets "Schematic Supply Nets_9" [InNet('P12V0')] p7: voltage=0.000
SupplyNets "Schematic Supply Nets_7" [InNet('P12V0F')] p8: voltage=0.000
SupplyNets "Schematic Supply Nets_6" [InNet('P12V0A')] p9: voltage=0.000
SupplyNets "Schematic Supply Nets_5" [InNet('STRIP1')] p10: voltage=0.000
SupplyNets "Schematic Supply Nets_4" [InNet('P13V0_SW')] p11: voltage=0.000
SupplyNets "Schematic Supply Nets_3" [InNet('P3V3REF')] p12: voltage=0.000
SupplyNets "Schematic Supply Nets_2" [InNet('P5V0A')] p13: voltage=0.000
SupplyNets "Schematic Supply Nets_1" [InNet('GND')] p14: voltage=0.000
UnConnectedPin [All] p1 off:
ViasUnderSMD ViasUnderSMD_1 [( InNet('GND') AND ((InComponent('IC1') or InComponent('IC29') or InComponent('IC2A') or InComponent('IC2B') or InComponent('IC3A') or InComponent('IC3B') or InComponent('IC14') or InComponent('IC15') or InComponent('IC18')) ) or InComponent('IC30') or InComponent('IC31')   )] p1: allowed=TRUE
ViasUnderSMD [All] p2: allowed=FALSE
Width Width_Power [InNet('P3V3') or InNet('P3V3A') Or InNet('P3V3REF') Or InNet('P3V3_MP') Or InNet('P5V0') Or InNet('P5V0A') Or InNet('P5V5') Or InNet('P6V5') Or InNet('P6V5A') Or InNet('P12V0') Or InNet('P12V0A') Or InNet('P12V0_EEM') Or InNet('P12VA') Or InNet('NetC39A_2') Or InNet('NetC20_1') Or InNet('NetC20_2') Or InNet('NetC38_2') Or InNet('NetIC4_2') Or InNet('NetC24_2')] p1: maxlimit=2.54 minlimit=0.254 preferedwidth=0.508
Width Width_50Ohm [InNetClass('50Ohm') or InNetClass('50_Ohms')] p2: maxlimit=0.643 minlimit=0.397 preferedwidth=0.643 toplayer_minwidth=0.643 impedanceprofiledriven=TRUE impedanceprofileid={7386AE32-3C75-4283-AD49-9C24A87270F1} impedanceprofilevalue=50.000000 minimp=50.000000 maximp=50.000000 favimp=50.000000
Width [All] p3: maxlimit=2 minlimit=0.127 preferedwidth=0.152
15 further rules are at their usual default settings.

## Classes and differential pairs
differential pair class MGT: BP_MGT_Rx BP_MGT_Tx
differential pair class Diff_100Ohm: BP_CLK.CLK BP_IO.LVDS0 BP_IO.LVDS1 BP_IO.LVDS2 BP_IO.LVDS3 BP_IO.LVDS4 BP_IO.LVDS5 BP_IO.LVDS6 BP_IO.LVDS7 BP_IO.LVDS8 BP_IO.LVDS9 BP_IO.LVDS10 BP_IO.LVDS11 BP_IO.LVDS12 BP_IO.LVDS13 BP_IO.LVDS14 BP_IO.LVDS15 EEM_IO.LVDS0 EEM_IO.LVDS1 EEM_IO.LVDS2 EEM_IO.LVDS3 EEM_IO.LVDS4 EEM_IO.LVDS5 EEM_IO.LVDS6 EEM_IO.LVDS7 EEM_IO.LVDS8 EEM_IO.LVDS9 EEM_IO.LVDS10 EEM_IO.LVDS11 EEM_IO.LVDS12 EEM_IO.LVDS13 EEM_IO.LVDS14 EEM_IO.LVDS15 PE_CLK
net class GA[0..3]: GA0 GA1 GA2 GA3
net class EEM_IO.LVDS_P[0..9]: EEM_IO.LVDS_P0 EEM_IO.LVDS_P1 EEM_IO.LVDS_P2 EEM_IO.LVDS_P3 EEM_IO.LVDS_P4 EEM_IO.LVDS_P5 EEM_IO.LVDS_P6 EEM_IO.LVDS_P7 EEM_IO.LVDS_P8 EEM_IO.LVDS_P9
net class EEM_IO.LVDS_N[0..9]: EEM_IO.LVDS_N0 EEM_IO.LVDS_N1 EEM_IO.LVDS_N2 EEM_IO.LVDS_N3 EEM_IO.LVDS_N4 EEM_IO.LVDS_N5 EEM_IO.LVDS_N6 EEM_IO.LVDS_N7 EEM_IO.LVDS_N8 EEM_IO.LVDS_N9
component class U_Temp_monitoring: D12 T_C5 T_C8 T_IC4 T_IC6 T_R25
component class U_PWR_Supply: T_C1 T_C2 T_IC1 T_R2 T_R4 T_R7 T_R8
component class U_Power-up_delay: T_C13 T_C14 T_C15 T_C16 T_C17 T_C18 T_C19 T_C20 T_C21 T_D6 T_IC7 T_R29 T_R30 T_R31 T_R32 T_R33 T_R34 T_T2 T_T3 T_T4 T_T5
component class U_Mechanical: FTG1 FTG2 FTG3 FTG4 FTG5 FTG6 S1 S2 S3 S4 T_B7 T_B8 T_C12 T_M2 T_M3 T_M4 T_R26 T_R27 T_R28 WASHER2 WASHER4 WASHER6 WASHER8
component class U_DIOT_signal_routing: T_C22 T_C23 T_IC8 T_R35 T_R36 T_R37 T_R38 T_R39 T_R40 T_R41 T_R42 T_R43 T_R44 T_R51 T_R52 T_R53 T_R54 T_R55 T_R56 T_R57 T_R58 T_R59 T_R60
component class "Power input connector": T_C9 T_C10 T_C11 T_D5 T_FL1 T_J6
component class Indicators: T_B1 T_B2 T_B3 T_B4 T_B5 T_B6 T_LD1 T_LD2 T_LD4 T_R1 T_R3 T_R6 T_T1
component class "I2C switch": T_C24 T_C25 T_IC9 T_R67 T_R68 T_R69
component class EEM_Connectors: T_C3 T_C4 T_D1 T_IC2 T_IC3 T_J1
net class ESD_STRIP: STRIP1 STRIP2 STRIP3
net class PWR: NetT_C2_1 NetT_C11_2 P3V3 P3V3_MP P3V3A P5V0A P5V5 P5V5A P12V0 P12V0_SW P12V0F
net class BP_IO.LVDS_P[0..9]: BP_IO.LVDS_P0 BP_IO.LVDS_P1 BP_IO.LVDS_P2 BP_IO.LVDS_P3 BP_IO.LVDS_P4 BP_IO.LVDS_P5 BP_IO.LVDS_P6 BP_IO.LVDS_P7 BP_IO.LVDS_P8 BP_IO.LVDS_P9
net class BP_IO.LVDS_N[0..9]: BP_IO.LVDS_N0 BP_IO.LVDS_N1 BP_IO.LVDS_N2 BP_IO.LVDS_N3 BP_IO.LVDS_N4 BP_IO.LVDS_N5 BP_IO.LVDS_N6 BP_IO.LVDS_N7 BP_IO.LVDS_N8 BP_IO.LVDS_N9
component class Overlapping: T_J4
component class CPCIS_Connectors_P1_P6: T_D2 T_D3 T_J4 T_R13 T_R14 T_R15 T_R16 T_R17 T_R18 T_R19
channel class SiLPA_RF_detector: U_SiLPA_RF_detector0 U_SiLPA_RF_detector1
channel class SiLPA_RF_channel_preamp: U_SiLPA_RF_channel_preamp0 U_SiLPA_RF_channel_preamp1
channel class SiLPA_RF_channel: U_SiLPA_RF_channel0 U_SiLPA_RF_channel1
net class 50_Ohm: NetJ2A_1 NetJ2B_1
component class U_SiLPA_RF_detector1: C51B C52B C53B C54B C55B C56B C57B C58B C59B C60B C61B C245B FB2B IC9B IC10B IC11B IC12B IC17B IC24B R23B R24B R25B R27B R31B R32B R33B R52B
component class U_SiLPA_RF_detector0: C51A C52A C53A C54A C55A C56A C57A C58A C59A C60A C61A C245A FB2A IC9A IC10A IC11A IC12A IC17A IC24A R23A R24A R25A R27A R31A R32A R33A R52A
component class U_SiLPA_RF_channel_preamp1: C1B C2B C3B C4B C5B C6B C7B C8B C9B C11B C12B C13B C14B C15B C16B C17B C18B C19B D1B D2B D3B IC1B IC2B IC3B J2B L1B L2B L3B L4B L5B R1B R2B R3B R4B R5B R6B R7B R8B R9B R10B
component class U_SiLPA_RF_channel_preamp0: C1A C2A C3A C4A C5A C6A C7A C8A C9A C11A C12A C13A C14A C15A C16A C17A C18A C19A D1A D2A D3A IC1A IC2A IC3A J2A L1A L2A L3A L4A L5A R1A R2A R3A R4A R5A R6A R7A R8A R9A R10A
component class U_SiLPA_RF_channel1: B5B B6B B7B B8B B9B B10B B11B B12B B13B B14B B15B B16B B17B C39B C40B C41B C42B C43B C44B C45B C46B C47B C48B C49B C50B IC7B L11B L12B L13B L15B L17B L18B R18B R19B R21B R29B R59B R60B R62B R71B R73B SCREW1B SCREW2B SCREW3B SCREW4B SCREW5B SCREW6B SCREW7B SCREW8B SCREW9B SCREW10B SCREW11B SCREW12B SCREW13B T6B T7B T8B TR1B TR2B
component class U_SiLPA_RF_channel0: B5A B6A B7A B8A B9A B10A B11A B12A B13A B14A B15A B16A B17A C39A C40A C41A C42A C43A C44A C45A C46A C47A C48A C49A C50A IC7A L11A L12A L13A L15A L17A L18A R18A R19A R21A R29A R59A R60A R62A R71A R73A SCREW1A SCREW2A SCREW3A SCREW4A SCREW5A SCREW6A SCREW7A SCREW8A SCREW9A SCREW10A SCREW11A SCREW12A SCREW13A T6A T7A T8A TR1A TR2A
component class U_SiLPA_PWR_Supply: C23 C24 C25 C26 C27 C28 C29 C30 C31 C33 C34 C35 C36 C37 C38 C67 C68 C69 C77 C93 C95 C96 C97 C98 C104 C105 C106 C107 C108 C109 C110 C111 C112 C113 C114 IC5 IC8 IC28 IC29 IC30 IC31 IC34 IC35 J11 L6 L7 L8 L9 L10 L14 LD10 LD11 LD12 LD13 LD14 LD16 LD18 R17 R28 R30 R40 R41 R48 R49 R50 R55 R56 R57 R58 R68 R80 R81 R82 R83 R91 R96 R97 R98 R99 R100 R101 R102 R103 R104 R105 R106 R107 R108 R110 R216 R218 RT1 T14 TP1 TP2 TP3 TP5 TP16 TP18 TP22 TP23 U1
component class U_SiLPA_LVDS_IFC: C10 C32 C62 C63 C64 C99 C116 IC4 IC6 IC13 IC14 IC15 IC21 R16 R26 R34 R35 R36 R37 R38 R39 R42 R43 R44 R45 R46 R47 R51 R72 R117 R118 R119 RN3 RN4 T13 T17
component class U_SiLPA_MCU: C20 C21 C22 C65 C71 C72 C73 C74 C75 C76 C78 C79 C80 C94 D9 D10 D13 D17 FB1 FB3 FB4 IC16 IC23 J1 J10 JP1 L19 Q1 R63 R66 R69 R70 R75 R76 R77 R78 R92 R93 R94 R95 R109 R120 U2 W1
net class 50_Ohms: NetC2A_2 NetC2B_2 NetC3A_1 NetC3A_2 NetC3B_1 NetC3B_2 NetC11A_1 NetC11B_1 NetC12A_2 NetC12B_2 NetC13A_1 NetC13A_2 NetC13B_1 NetC13B_2 NetC14A_1 NetC14A_2 NetC14B_1 NetC14B_2 NetC15A_1 NetC15B_1 NetC16A_2 NetC16B_2 NetC42A_1 NetC42B_1 NetC43A_1 NetC43A_2 NetC43B_1 NetC43B_2 NetC44A_1 NetC44A_2 NetC44B_1 NetC44B_2 NetC45A_1 NetC45B_1 NetC46A_1 NetC46A_2 NetC46B_1 NetC46B_2 NetC52A_1 NetC52B_1
component class SiLPA: J3 J4 J5 J6 LD1 LD2 LD3 LD4 LD5 LD6 LD8 LD9 R11 R12 R13 R14 R15 R20 R22 R53 R61 R64 R74 R84 SW1 T1 T2 T3 T4 T9 T10 T11 T12
differential pair EEM_IO.LVDS9: +EEM_IO.LVDS_P9 -EEM_IO.LVDS_N9
differential pair EEM_IO.LVDS8: +EEM_IO.LVDS_P8 -EEM_IO.LVDS_N8
differential pair EEM_IO.LVDS7: +EEM_IO.LVDS_P7 -EEM_IO.LVDS_N7
differential pair EEM_IO.LVDS6: +EEM_IO.LVDS_P6 -EEM_IO.LVDS_N6
differential pair EEM_IO.LVDS5: +EEM_IO.LVDS_P5 -EEM_IO.LVDS_N5
differential pair EEM_IO.LVDS4: +EEM_IO.LVDS_P4 -EEM_IO.LVDS_N4
differential pair EEM_IO.LVDS3: +EEM_IO.LVDS_P3 -EEM_IO.LVDS_N3
differential pair EEM_IO.LVDS2: +EEM_IO.LVDS_P2 -EEM_IO.LVDS_N2
differential pair EEM_IO.LVDS1: +EEM_IO.LVDS_P1 -EEM_IO.LVDS_N1
differential pair EEM_IO.LVDS0: +EEM_IO.LVDS_P0 -EEM_IO.LVDS_N0
differential pair BP_MGT_Tx: +BP_MGT_Tx_P -BP_MGT_Tx_N
differential pair BP_MGT_Rx: +BP_MGT_Rx_P -BP_MGT_Rx_N
differential pair BP_IO.LVDS15: +BP_IO.LVDS_P15 -BP_IO.LVDS_N15
differential pair BP_IO.LVDS10: +BP_IO.LVDS_P10 -BP_IO.LVDS_N10
differential pair BP_CLK.CLK: +BP_CLK.CLK_P -BP_CLK.CLK_N
differential pair BP_IO.LVDS9: +BP_IO.LVDS_P9 -BP_IO.LVDS_N9
differential pair BP_IO.LVDS8: +BP_IO.LVDS_P8 -BP_IO.LVDS_N8
differential pair USB_D_R: +USB_D_R_P -USB_D_R_N
differential pair BP_IO.LVDS7: +BP_IO.LVDS_P7 -BP_IO.LVDS_N7
differential pair BP_IO.LVDS6: +BP_IO.LVDS_P6 -BP_IO.LVDS_N6
differential pair BP_IO.LVDS5: +BP_IO.LVDS_P5 -BP_IO.LVDS_N5
differential pair BP_IO.LVDS4: +BP_IO.LVDS_P4 -BP_IO.LVDS_N4
differential pair BP_IO.LVDS3: +BP_IO.LVDS_P3 -BP_IO.LVDS_N3
differential pair BP_IO.LVDS2: +BP_IO.LVDS_P2 -BP_IO.LVDS_N2
differential pair BP_IO.LVDS1: +BP_IO.LVDS_P1 -BP_IO.LVDS_N1
differential pair BP_IO.LVDS0: +BP_IO.LVDS_P0 -BP_IO.LVDS_N0
differential pair USB: +USB_P -USB_N

## Components (designator, comment, footprint, x,y, rotation, side; value= is the part's Value field where it differs from the comment)
B5A "Plated Hole" MTG240_400#1 2.97,73.25 r0 top (schematic designator B5)
B5B "Plated Hole" MTG240_400#1 2.97,36.25 r0 top (schematic designator B5)
B6A "Plated Hole" MTG240_400#2 55,76.95 r0 top (schematic designator B6)
B6B "Plated Hole" MTG240_400#1 55,39.95 r0 top (schematic designator B6)
B7A "Plated Hole" MTG240_400#1 3.01,56.75 r0 top (schematic designator B7)
B7B "Plated Hole" MTG240_400#1 3.01,19.75 r0 top (schematic designator B7)
B8A "Plated Hole" MTG240_400#2 33.5,76.933 r0 top (schematic designator B8)
B8B "Plated Hole" MTG240_400#1 33.5,39.95 r0 top (schematic designator B8)
B9A "Plated Hole" MTG240_400#1 74,81 r0 top (schematic designator B9)
B9B "Plated Hole" MTG240_400#1 74,44 r0 top (schematic designator B9)
B10A "Plated Hole" MTG240_400#1 11.75,89 r0 top (schematic designator B10)
B10B "Plated Hole" MTG240_400#1 11.75,52 r0 top (schematic designator B10)
B11A "Plated Hole" MTG240_400#2 32.5,60.5 r0 top locked (schematic designator B11)
B11B "Plated Hole" MTG240_400#1 32.5,23.5 r0 top (schematic designator B11)
B12A "Plated Hole" MTG240_400#1 74,58 r0 top (schematic designator B12)
B12B "Plated Hole" MTG240_400#1 74,21 r0 top (schematic designator B12)
B13A "Plated Hole" MTG240_400#1 112.25,89 r0 top (schematic designator B13)
B13B "Plated Hole" MTG240_400#2 112.25,52 r0 top (schematic designator B13)
B14A "Plated Hole" MTG240_400#2 112.25,57 r0 top (schematic designator B14)
B14B "Plated Hole" MTG240_400#1 112.25,20 r0 top (schematic designator B14)
B15A "Plated Hole" MTG240_400#1 47.75,89 r0 top (schematic designator B15)
B15B "Plated Hole" MTG240_400#1 47.75,52 r0 top (schematic designator B15)
B16A "Plated Hole" MTG240_400#1 86,89 r0 top (schematic designator B16)
B16B "Plated Hole" MTG240_400#1 86,52 r0 top (schematic designator B16)
B17A "Plated Hole" MTG240_400#2 100.45,76.75 r0 top (schematic designator B17)
B17B "Plated Hole" MTG240_400#1 100.45,39.75 r0 top (schematic designator B17)
C1A "10nF" CAPC1005X55N 90.89,70.34 r90 top (schematic designator C1)
C1B "10nF" CAPC1005X55N 90.89,33.34 r90 top (schematic designator C1)
C2A "Undefined" CAPC1608X90N 63.06,67.12 r180 top (schematic designator C2)
C2B "Undefined" CAPC1608X90N 63.06,30.12 r180 top (schematic designator C2)
C3A "2.2nF" CAPC1608X87N 55.69,67.8 r270 top (schematic designator C3)
C3B "2.2nF" CAPC1608X87N 55.69,30.8 r270 top (schematic designator C3)
C4A "4.7uF" CAPC1709X95N 73.1,70.8 r270 top (schematic designator C4)
C4B "4.7uF" CAPC1709X95N 73.1,33.8 r270 top (schematic designator C4)
C5A "100nF" CAPC1608X87N 74.715,70.774 r270 top (schematic designator C5)
C5B "100nF" CAPC1608X87N 74.715,33.774 r270 top (schematic designator C5)
C6A "680pF" CAPC1608X87N 71.52,70.79 r270 top (schematic designator C6)
C6B "680pF" CAPC1608X87N 71.52,33.79 r270 top (schematic designator C6)
C7A "680pF" CAPC1608X87N 52.31,70.79 r270 top (schematic designator C7)
C7B "680pF" CAPC1608X87N 52.31,33.79 r270 top (schematic designator C7)
C8A "100nF" CAPC1608X87N 50.731,70.809 r270 top (schematic designator C8)
C8B "100nF" CAPC1608X87N 50.731,33.809 r270 top (schematic designator C8)
C9A "4.7uF" CAPC1709X95N 49.26,70.85 r270 top (schematic designator C9)
C9B "4.7uF" CAPC1709X95N 49.26,33.85 r270 top (schematic designator C9)
C10 "100nF" CAPC1005X55N 158.804,53.615 r0 top
C11A "680pF" CAPC1608X87N 98.43,68.03 r180 top (schematic designator C11)
C11B "680pF" CAPC1608X87N 98.43,31.03 r180 top (schematic designator C11)
C12A "680pF" CAPC1608X87N 89.7,66.75 r180 top (schematic designator C12)
C12B "680pF" CAPC1608X87N 89.7,29.75 r180 top (schematic designator C12)
C13A "680pF" CAPC1608X87N 80.7,68.1 r180 top (schematic designator C13)
C13B "680pF" CAPC1608X87N 80.7,31.1 r180 top (schematic designator C13)
C14A "330pF" CAPC1608X87N 71.25,64.979 r180 top (schematic designator C14)
C14B "330pF" CAPC1608X87N 71.25,27.979 r180 top (schematic designator C14)
C15A "680pF" CAPC1608X87N 63.32,65.07 r180 top (schematic designator C15)
C15B "680pF" CAPC1608X87N 63.32,28.07 r180 top (schematic designator C15)
C16A "680pF" CAPC1608X87N 47.98,66.771 r180 top (schematic designator C16)
C16B "680pF" CAPC1608X87N 47.98,29.771 r180 top (schematic designator C16)
C17A "100pF" CAPC1005X55N 97.53,65.93 r0 top (schematic designator C17)
C17B "100pF" CAPC1005X55N 97.53,28.93 r0 top (schematic designator C17)
C18A "10uF" CAPC1608X80N 95.14,64.25 r0 top (schematic designator C18)
C18B "10uF" CAPC1608X80N 95.14,27.25 r0 top (schematic designator C18)
C19A "100nF" CAPC1005X55N 97.54,64.97 r180 top (schematic designator C19)
C19B "100nF" CAPC1005X55N 97.54,27.97 r180 top (schematic designator C19)
C20 "100nF" CAPC1005X55N 129.9,9.925 r90 top
C21 "1uF" CAPC2012X110N 129.4,12.78 r270 top
C22 "100nF" CAPC1005X55N 135.54,13.396 r90 top
C23 "22uF" CAPC3216X180N 161.25,61.974 r90 top
C24 "22uF" CAPC3216X180N 150.8,66.5 r270 top
C25 "22uF" CAPC3216X180N 161.25,66.75 r270 top
C26 "1uF" CAPC1608X87N 143.544,56.788 r180 top
C27 "10uF" CAPMP3216X180N 150.473,79.89 r90 top
C28 "22uF" CAPC3216X180N 152.781,80.69 r270 top
C29 "22uF" CAPC3216X180N 163.7,61.974 r90 top
C30 "22uF" CAPC3216X180N 137.549,72.479 r180 top
C31 "10uF" CAPMP3216X180N 143,69.94 r180 top
C32 "100nF" CAPC1005X55N 158.979,50.9 r0 top
C33 "22uF" CAPC3216X180N 166.185,80.79 r180 top
C34 "100nF" CAPC1005X55N 169.479,80.59 r270 top
C35 "22uF" CAPC3216X180N 166.185,83.047 r180 top
C36 "100nF" CAPC1005X55N 169.8,74.5 r0 top
C37 "22uF" CAPC3216X180N 172.25,65 r270 top
C38 "22uF" CAPC3216X180N 172.729,77.39 r270 top
C39A "100nF" CAPC1608X87N 26.136,61.875 r90 top (schematic designator C39)
C39B "100nF" CAPC1608X87N 26.136,24.875 r90 top (schematic designator C39)
C40A "100nF" CAPC1608X87N 20.57,61.16 r0 top (schematic designator C40)
C40B "100nF" CAPC1608X87N 20.57,24.16 r0 top (schematic designator C40)
C41A "0.5pF" CAPC1608X87N 28.25,71 r90 top (schematic designator C41)
C41B "0.5pF" CAPC1608X87N 28.25,34 r90 top (schematic designator C41)
C42A "1nF" CAPC1608X90N 36.864,71.849 r180 top (schematic designator C42)
C42B "1nF" CAPC1608X90N 36.864,34.849 r180 top (schematic designator C42)
C43A "330pF" CAPC1608X87N 21.49,70.75 r180 top (schematic designator C43)
C43B "330pF" CAPC1608X87N 21.49,33.75 r180 top (schematic designator C43)
C44A "2.2nF" CAPC1608X87N 9.488,68.78 r270 top (schematic designator C44)
C44B "2.2nF" CAPC1608X87N 9.488,31.78 r270 top (schematic designator C44)
C45A "1nF" CAPC1608X90N 36.85,66.758 r180 top (schematic designator C45)
C45B "1nF" CAPC1608X90N 36.85,29.758 r180 top (schematic designator C45)
C46A "330pF" CAPC1608X87N 21.37,65.344 r180 top (schematic designator C46)
C46B "330pF" CAPC1608X87N 21.37,28.344 r180 top (schematic designator C46)
C47A "0.5pF" CAPC1608X87N 28.25,66.75 r90 top (schematic designator C47)
C47B "0.5pF" CAPC1608X87N 28.25,29.75 r90 top (schematic designator C47)
C48A "10nF" CAPC1608X87N 30.645,73.815 r180 top (schematic designator C48)
C48B "10nF" CAPC1608X87N 30.645,36.815 r180 top (schematic designator C48)
C49A "10nF" CAPC1608X87N 29.5,63.75 r0 top (schematic designator C49)
C49B "10nF" CAPC1608X87N 29.5,26.75 r0 top (schematic designator C49)
C50A "Undefined" CAPC1608X90N 21.49,69.06 r0 top (schematic designator C50)
C50B "Undefined" CAPC1608X90N 21.49,32.06 r0 top (schematic designator C50)
C51A "100pF" CAPC1005X55N 43.16,75.48 r90 top (schematic designator C51)
C51B "100pF" CAPC1005X55N 43.16,38.48 r90 top (schematic designator C51)
C52A "2.2nF" CAPC1608X87N 17.63,74.12 r0 top (schematic designator C52)
C52B "2.2nF" CAPC1608X87N 17.63,37.12 r0 top (schematic designator C52)
C53A "10nF" CAPC1005X55N 27.825,77.375 r180 top (schematic designator C53)
C53B "10nF" CAPC1005X55N 27.825,40.375 r180 top (schematic designator C53)
C54A "1nF" CAPC1005X55N 25.286,75.93 r90 top (schematic designator C54)
C54B "1nF" CAPC1005X55N 25.286,38.93 r90 top (schematic designator C54)
C55A "100nF" CAPC1005X55N 27.27,75.93 r270 top (schematic designator C55)
C55B "100nF" CAPC1005X55N 27.27,38.93 r270 top (schematic designator C55)
C56A "100nF" CAPC1005X55N 58.268,73.9 r270 top (schematic designator C56)
C56B "100nF" CAPC1005X55N 58.268,36.9 r270 top (schematic designator C56)
C57A "100nF" CAPC1005X55N 39.629,73.974 r0 top (schematic designator C57)
C57B "100nF" CAPC1005X55N 39.728,37.1 r0 top (schematic designator C57)
C58A "100nF" CAPC1005X55N 81.64,76.7 r270 top (schematic designator C58)
C58B "100nF" CAPC1005X55N 81.64,39.7 r270 top (schematic designator C58)
C59A "100pF" CAPC1005X55N 24.209,74.55 r90 top (schematic designator C59)
C59B "100pF" CAPC1005X55N 24.209,37.55 r90 top (schematic designator C59)
C60A "100nF" CAPC1005X55N 24.209,76.43 r90 top (schematic designator C60)
C60B "100nF" CAPC1005X55N 24.286,39.44 r90 top (schematic designator C60)
C61A "100nF" CAPC1005X55N 48.5,77.5 r90 top (schematic designator C61)
C61B "100nF" CAPC1005X55N 48.5,40.5 r90 top (schematic designator C61)
C62 "100nF" CAPC1005X55N 158.987,38.771 r0 top
C63 "100nF" CAPC1005X55N 158.998,40.952 r0 top
C64 "100nF" CAPC1005X55N 158.941,29.359 r0 top
C65 "6.8pF" CAPC1005X55N 133.075,25.767 r180 top
C67 "100nF" CAPC1005X55N 196.425,75.95 r270 top
C68 "1uF" CAPC1608X87N 181.5,80.25 r180 top
C69 "1uF" CAPC1608X87N 181.7,62.15 r90 top
C71 "6.8pF" CAPC1005X55N 132.165,21.228 r180 top
C72 "100nF" CAPC1005X55N 136.25,21.05 r0 top
C73 "2.2uF" CAPC1608X90N 147.605,27.084 r180 top
C74 "100nF" CAPC1005X55N 20.32,8.578 r90 top
C75 "2.2uF" CAPC1608X90N 146.478,16.808 r90 top
C76 "100nF" CAPC1005X55N 145.168,17.16 r90 top
C77 "100nF" CAPC1005X55N 160,80.5 r0 top
C78 "100nF" CAPC1005X55N 147.3,25.767 r180 top
C79 "100nF" CAPC1005X55N 138.556,27.471 r0 top
C80 "2.2uF" CAPC1608X90N 143.865,16.551 r90 top
C93 "10nF" CAPC1608X87N 196.425,64.775 r180 top
C94 "1uF" CAPC2012X110N 136.948,17.825 r90 top
C95 "100nF" CAPC1005X55N 167.885,78.215 r270 bottom
C96 "2.2uF" CAPC1005X55N 173.789,77.64 r180 bottom
C97 "1uF" CAPC1608X87N 130.487,70.41 r0 top
C98 "1uF" CAPC1608X87N 125.54,77.526 r90 top
C99 "1uF" CAPC1005X55N 169.5,92.5 r270 top
C104 "22uF" CAPC3216X180N 163.7,66.75 r270 top
C105 "22uF" CAPC3216X180N 146.665,54.987 r90 top
C106 "22uF" CAPC3216X180N 151.177,58.086 r90 top
C107 "22uF" CAPC3216X180N 167.215,60.426 r0 top
C108 "1uF" CAPC1608X87N 172.725,68 r0 top
C109 "100nF" CAPC1005X55N 169.479,67.05 r180 bottom
C110 "Undefined" CAPC1005X55N 171.979,69.201 r180 top
C111 "220pF" CAPC1005X55N 173.529,69.7 r90 top
C112 "1uF" CAPC1608X87N 190.1,69.625 r0 top
C113 "1uF" CAPC1608X87N 192.9,75.625 r180 top
C114 "22uF" CAPC3216X180N 187.6,79.175 r270 top
C116 "100nF" CAPC1005X55N 137.775,15.015 r270 top
C245A "100nF" CAPC1005X55N 79.283,78.375 r180 top (schematic designator C245)
C245B "100nF" CAPC1005X55N 79.283,41.375 r180 top (schematic designator C245)
D1A "SZNUP1301ML3T1G" SOT95P240X110-3N 10.112,82.443 r90 top (schematic designator D1)
D1B "SZNUP1301ML3T1G" SOT95P240X110-3N 10,45.837 r90 top (schematic designator D1)
D2A "AQ4021-01FTG-C" SOD2513X114N 74.85,65.28 r90 top (schematic designator D2)
D2B "AQ4021-01FTG-C" SOD2513X114N 74.85,28.28 r90 top (schematic designator D2)
D3A "AQ4021-01FTG-C" SOD2513X114N 53.89,68.06 r270 top (schematic designator D3)
D3B "AQ4021-01FTG-C" SOD2513X114N 53.89,31.06 r270 top (schematic designator D3)
D9 "PRTR5V0U2X" SOT190P230X110-4N 175.035,5.539 r270 top
D10 "BAT165" SOD2512X110N 165.182,7.989 r270 top
D12 "BAT165" SOD2512X110N 175.5,12.525 r270 top
D13 "PRTR5V0U2X" SOT190P230X110-4N 19.266,11.495 r270 top
D17 "BAT165" SOD2512X110N 163.495,11.844 r0 top
FB1 "220R@100MHz" INDC1005X55N 136.235,20.075 r0 top
FB2A "220R@100MHz" INDC1005X55N 28.73,75.63 r180 top (schematic designator FB2)
FB2B "220R@100MHz" INDC1005X55N 28.73,38.63 r180 top (schematic designator FB2)
FB3 "220R@100MHz" INDC1005X55N 127.94,10.375 r180 top
FB4 "220R@100MHz" INDC1005X55N 18.669,9.017 r180 top
FTG1 "Use only in PCB" FIDUCIAL_TOP_C100-200#1 208.325,95.5 r90 top
FTG2 "Use only in PCB" FIDUCIAL_TOP_S100-200 208.275,95.5 r90 bottom
FTG3 "Use only in PCB" FIDUCIAL_TOP_S100-200 16.15,5.8 r90 top
FTG4 "Use only in PCB" FIDUCIAL_TOP_C100-200#2 16.15,5.8 r90 bottom
FTG5 "Use only in PCB" FIDUCIAL_TOP_S100-200 16.15,95.5 r90 top
FTG6 "Use only in PCB" FIDUCIAL_TOP_S100-200 16.15,95.5 r90 bottom
IC1A "HMC349ALP4CE" QFN65P400X400X100-17N-S255 93.962,67.646 r180 top (schematic designator IC1)
IC1B "HMC349ALP4CE" QFN65P400X400X100-17N-S255 93.962,30.646 r180 top (schematic designator IC1)
IC2A "ADL5536ARKZ" ANALOG-DEVICES_SOT-89(RK-3) 78.333,64.504 r270 top (schematic designator IC2)
IC2B "ADL5536ARKZ" ANALOG-DEVICES_SOT-89(RK-3) 78.333,27.504 r270 top (schematic designator IC2)
IC3A "PHA-1+" MINI-CIRCUITS_DF782 58.975,64.9 r180 top (schematic designator IC3)
IC3B "PHA-1+" MINI-CIRCUITS_DF782 58.975,27.9 r180 top (schematic designator IC3)
IC4 "FIN1027AMX" SOIC127P600X175-8N 163.779,48.8 r0 top
IC5 "TPS62148RGX" TEXAS_RGX0011A 169.729,77.39 r180 top
IC6 "FIN1028MX" SOIC127P600X175-8N 163.678,55.52 r180 top
IC7A "QPB8808" QFN50P500X700X80-41N-R360X560 32.25,68.75 r180 top (schematic designator IC7)
IC7B "QPB8808" QFN50P500X700X80-41N-R360X560 32.25,31.75 r180 top (schematic designator IC7)
IC8 "MIC29302AWD" TO127P991X239-6N-R585X701 144.566,77.09 r90 top
IC9A "ADL5904ACPZN-R7" QFN50P300X300X80-17N-S175 21.49,75.68 r90 top (schematic designator IC9)
IC9B "ADL5904ACPZN-R7" QFN50P300X300X80-17N-S175 21.49,38.68 r90 top (schematic designator IC9)
IC10A "ADCMP600BRJZ-R2" SOT95P280X145-5N 45.79,76.48 r0 top (schematic designator IC10)
IC10B "ADCMP600BRJZ-R2" SOT95P280X145-5N 45.79,39.48 r0 top (schematic designator IC10)
IC11A "SN74LVC112APWR" SOP65P640X120-16N 63,75.5 r180 top (schematic designator IC11)
IC11B "SN74LVC112APWR" SOP65P640X120-16N 63,38.5 r180 top (schematic designator IC11)
IC12A "MCP6291T-E/OT" SOT95P270X145-5N 39.936,76.469 r180 top (schematic designator IC12)
IC12B "MCP6291T-E/OT" SOT95P270X145-5N 39.936,39.469 r180 top (schematic designator IC12)
IC13 "FIN1028MX" SOIC127P600X175-8N 163.778,42.857 r180 top
IC14 "FIN1027AMX" SOIC127P600X175-8N 163.75,36.849 r0 top
IC15 "FIN1028MX" SOIC127P600X175-8N 163.724,31.264 r180 top
IC16 "STM32C552CEU6" QFN50P700X700X60-49N-S570 142.103,22.742 r0 top
IC17A "SN74LVC1G08DBVR" SN74LVC1G08DBVR 84.465,77.259 r180 top (schematic designator IC17)
IC17B "SN74LVC1G08DBVR" SN74LVC1G08DBVR 84.465,40.259 r180 top (schematic designator IC17)
IC21 "FIN1028MX" SOIC127P600X175-8N 139.67,10.075 r90 top
IC23 "STM809SWX6F" SOT-23 163.647,10.038 r180 top
IC24A "SN74LVC1G32DBVR" SOT95P280X145-5N 78.533,75.845 r0 top (schematic designator IC24)
IC24B "SN74LVC1G32DBVR" SOT95P280X145-5N 78.533,38.845 r0 top (schematic designator IC24)
IC28 "TPS7A7001DDA" SOIC127P600X170-9N-R240X310 137.274,78.386 r270 top
IC29 "LTC3624EDD-2" SON50P300X300X80-9N-R175X248 170.479,77.39 r0 bottom
IC30 "LD1117DT33CTR" TO228P972X240-3N-R540X510 182,73.75 r270 top
IC31 "LD1117DT33CTR" TO228P972X240-3N-R540X510 129.987,76.893 r90 top
IC34 "LT8337EV-1" "ANALOG-DEVICES_LQFN(16) # 05-08-1798" 168.95,68.3 r270 top
IC35 "MIC29302AWD" TO127P991X239-6N-R585X701 144.44,63.305 r90 top
J1 "216989-0001" FP-2169890001-MFG 1.825,12.925 r270 top locked
J2A "U.FL" HIROSE_U.FL-R-SMT-1(10) 87.28,71.22 r0 top (schematic designator J2)
J2B "U.FL" HIROSE_U.FL-R-SMT-1(10) 87.28,34.22 r0 top (schematic designator J2)
J3 "SMA" DELOCK_65848 4.134,83.25 r180 top locked
J4 "SMA" DELOCK_65848 4.134,66.75 r180 top locked
J5 "SMA" DELOCK_65848 4.134,46.25 r180 top locked
J6 "SMA" DELOCK_65848 4.134,29.5 r180 top locked
J10 "Header 10" HARWIN_M50-3600542 169.74,8.639 r180 top
J11 "KK®" MOLEX_22-04-1021 188.375,73.35 r0 top
JP1 "1798942 (goldpin 2x 2.54)" Jumper 144.358,37.366 r0 top
L1A "1000R@100MHz" INDC1608X95N 76.25,70.77 r270 top (schematic designator L1)
L1B "1000R@100MHz" INDC1608X95N 76.25,33.77 r270 top (schematic designator L1)
L2A "1000R@100MHz" INDC1608X95N 55.99,70.77 r0 top (schematic designator L2)
L2B "1000R@100MHz" INDC1608X95N 55.99,33.77 r0 top (schematic designator L2)
L3A "1.2uH" ADL2012S1R2MT01 72.22,67.58 r270 top (schematic designator L3)
L3B "1.2uH" ADL2012S1R2MT01 72.22,30.58 r270 top (schematic designator L3)
L4A "1.2uH" ADL2012S1R2MT01 51.2,67.64 r270 top (schematic designator L4)
L4B "1.2uH" ADL2012S1R2MT01 51.2,30.64 r270 top (schematic designator L4)
L5A "390R@100MHz" INDC1608X95N 99.29,65.13 r90 top (schematic designator L5)
L5B "390R@100MHz" INDC1608X95N 99.29,28.13 r90 top (schematic designator L5)
L6 "1.5uH" IND_TDK_SPM6530 155.925,64.7 r180 top
L7 "120R@100MHz" INDC1608X75N 139.744,59.687 r270 top
L8 "1.5uH" IND_TDK_SPM6530 157.75,86.55 r270 top
L9 "1.5uH" IND_TDK_SPM6530 163.25,76 r90 top
L10 "1.5uH" IND_TDK_SPM6530 155.6,75.6 r180 top
L11A "1uH" INDC2012X110N 23.16,62.11 r270 top (schematic designator L11)
L11B "1uH" INDC2012X110N 23.16,25.11 r270 top (schematic designator L11)
L12A "680nH" 0603AF681XJRW 26.286,72.865 r90 top (schematic designator L12)
L12B "680nH" 0603AF681XJRW 26.286,35.865 r90 top (schematic designator L12)
L13A "LQG15HS1N5B02D" LQG15WH0N7B02D 25.392,70.56 r180 top value=1.5nH (schematic designator L13)
L13B "LQG15HS1N5B02D" LQG15WH0N7B02D 25.392,33.56 r180 top value=1.5nH (schematic designator L13)
L14 "3.3uH" IND_COILCRAFT_XAL4030 168.5,64.1 r180 top
L15A "680nH" 0603AF681XJRW 26.285,65.11 r270 top (schematic designator L15)
L15B "680nH" 0603AF681XJRW 26.285,28.11 r270 top (schematic designator L15)
L17A "LQG15HS1N5B02D" LQG15WH0N7B02D 25.286,67.576 r180 top value=1.5nH (schematic designator L17)
L17B "LQG15HS1N5B02D" LQG15WH0N7B02D 25.286,30.576 r180 top value=1.5nH (schematic designator L17)
L18A "680nH" 0603AF681XJRW 37.12,69.31 r90 top (schematic designator L18)
L18B "680nH" 0603AF681XJRW 37.12,32.31 r90 top (schematic designator L18)
L19 "90R@100MHz" IND_MURATA_DLW21S 16.066,11.495 r0 top
LD1 "Red" LED_AVAGO_HSMC-C120 -1.5,67.021 r90 top locked
LD2 "Red" LED_AVAGO_HSMC-C120 -1.5,29.5 r90 top locked